# Altium PCB JTag2SWD.PcbDoc
Units mm, origin at the board's own origin, x right, y up, seen from the top; angles counter-clockwise.
Board outline 152.4 x 101.6 mm, 2 copper layers (Top Layer, Bottom Layer); 2 components, 6 nets, 26 pads, 0 vias.
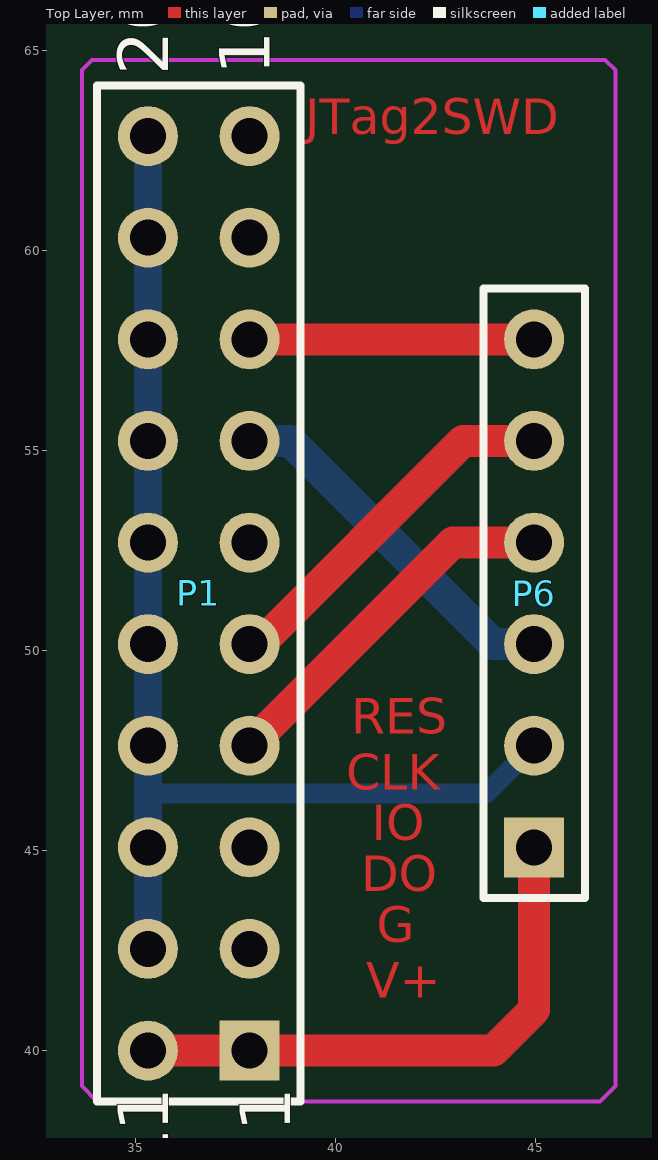
[diagram p0: Top Layer view]
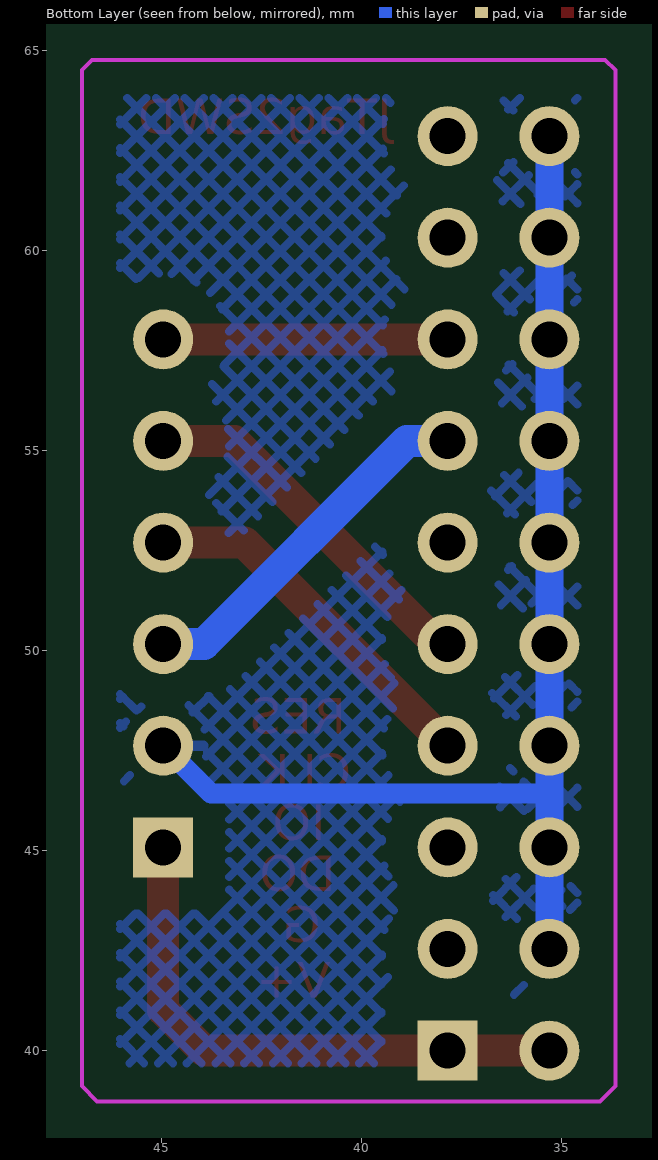
[diagram p1: Bottom Layer view, seen from below]

## Layer stack, top to bottom
Top Solder: solder mask 0.0102, Solder Resist, Dk 3.5
Top Layer: signal copper 0.0356
Dielectric 1: dielectric 0.32, FR-4, Dk 4.8
Bottom Layer: signal copper 0.0356
Bottom Solder: solder mask 0.0102, Solder Resist, Dk 3.5

## Board outline
25.4,25.4 177.8,25.4 177.8,127 25.4,127

## Design rules (kind name [scope] priority, off if disabled: settings)
Clearance Clearance_2 [InPolygon] p1: gap=0.8
Clearance Clearance_1 [(OnLayer('Keep-Out Layer'))] p2: gap=0
Clearance [All] p3: gap=0.2
ComponentClearance [All] p1 off: gap=0.254 collisioncheckmode=3 verticalgap=0.254 showdistances=FALSE
HoleSize [All] p1: absolutevalues=TRUE maxlimit=5 minlimit=0.025 maxpercent=80.000 minpercent=20.000
MinimumSolderMaskSliver [All] p1 off: minsoldermaskwidth=0.254
PolygonConnect [All] p1: connectstyle=Relief reliefconductorwidth=0.254 reliefentries=4 polygonreliefangle="90 Angle" airgapwidth=0.254
RoutingVias [All] p1: holewidth=0.6 width=0.9 viastyle="Through Hole" minholewidth=0.5 minwidth=0.7 maxholewidth=1.5 maxwidth=1.8
SilkToBoardRegionClearance [All] p1 off:
SilkToSilkClearance [All] p1 off: silktosilkclearance=0.254
SilkToSolderMaskClearance [IsPad] p1 off: minsilkscreentomaskgap=0.254 clearancetoexposedcopper=TRUE
SolderMaskExpansion [All] p1: expansion=0.102
Width [All] p1: maxlimit=5 minlimit=0.1 preferedwidth=0.3
24 further rules are at their usual default settings.

## Components (designator, comment, footprint, x,y, rotation, side; value= is the part's Value field where it differs from the comment)
P1 "Header 10X2A" HDR2X10_CEN 37.846,40.005 r90 top
P6 "ProgrammerSocket" HDR1X6 44.958,45.085 r90 top

## Footprints (in the part's own frame and the unit in brackets; to place one, negate y for a bottom-side part, rotate by r counter-clockwise, add the part's x,y. Pads: shape width x height; smd on the part's side, far side on the other; paste and mask are expansions set on the pad)
HDR1X6 [mm] "Connector; Header; 6 Position"
  rect 1.5x1.5 hole 0.9: 1(0,0)
  round 1.5 hole 0.9: 2(2.54,0) 3(5.08,0) 4(7.62,0) 5(10.16,0) 6(12.7,0)
  silkscreen extent -1.27,-1.27 13.97,1.27
HDR2X10_CEN [mm] "Connector; Header; 10x2 Position"
  rect 1.5x1.5 hole 0.9: 1(0,0)
  round 1.5 hole 0.9: 2(2.54,0) 3(5.08,0) 4(7.62,0) 5(10.16,0) 6(12.7,0) 7(15.24,0) 8(17.78,0) 9(20.32,0) 10(22.86,0) 11(0,2.54) 12(2.54,2.54) 13(5.08,2.54) 14(7.62,2.54) 15(10.16,2.54) 16(12.7,2.54) 17(15.24,2.54) 18(17.78,2.54) 19(20.32,2.54) 20(22.86,2.54)
  silkscreen extent -1.27,-1.27 24.13,3.81

## Part data
P1: "Header, 10-Pin, Dual row"
P6: library part "Header 6", "Header, 6-Pin"

## Nets (pads, with @x,y where several pads share a name; then routed paths per layer and width w, separated by ;. In a path a pad name is that pad's centre, name@x,y a point inside that pad or via, vN(x,y) a via of type N, cw(c..) or ccw(c..) an arc to the next point about the centre after c; other vN are vias at no path point)
GND: P1.12 P1.13 P1.14 P1.15 P1.16 P1.17 P1.18 P1.19 P1.20 P6.2 | length 30.4
  Bottom Layer w0.5: 35.363,46.425 43.758,46.425 P6.2
  Bottom Layer w0.7: P1.12 P1.13 P1.14 P1.15 P1.16 P1.17 P1.18 P1.19 P1.20
RESET: P1.8 P6.6 | length 7.1
  Top Layer w0.8: P1.8 P6.6
SWDCLK: P1.5 P6.5 | length 9.2
  Top Layer w0.8: P1.5 38.1,50.165 43.18,55.245 P6.5
SWDIO: P1.4 P6.4 | length 9.2
  Top Layer w0.8: P1.4 42.926,52.705 P6.4
SWDO: P1.7 P6.3 | length 9.2
  Bottom Layer w0.8: P1.7 38.862,55.245 43.942,50.165 P6.3
VCC: P1.1 P1.11 P6.1 | length 14.1
  Top Layer w0.8: P1.11 P1.1 43.942,40.005 44.958,41.021 P6.1
pads on no net: P1.2 P1.3 P1.6 P1.9 P1.10

## Polygon pours and split planes (outlines as drawn)
GND on Bottom Layer "Top Layer-No Net" (hatched 45Degree grid 0.508 track 0.203, pour order 0): 33.909,64.77 34.036,64.643 46.863,64.643 46.863,38.989 46.736,38.862 33.655,38.862

## Keep-outs
Keep-Out Layer:
  lines w0.1: 39.116,38.735 34.036,38.735 ; 34.036,38.735 33.655,39.116 33.655,64.516 33.909,64.77 46.736,64.77 46.99,64.516 46.99,39.116 46.609,38.735 34.036,38.735

## Other copper
Top Layer:
  text "JTag2SWD" at 39.243,62.611 h1.52
  text "RES" at 40.386,47.625 h1.52
  text "CLK" at 40.259,46.228 h1.52
  text "IO" at 40.894,44.958 h1.52
  text "DO" at 40.64,43.688 h1.52
  text "G" at 41.021,42.418 h1.52
  text "V+" at 40.767,41.021 h1.52

## Text inside footprints (layer, text, board x,y; h text height)
P1: Top Overlay "20" at 35.814,64.389 h1.27 r90; Top Overlay "10" at 38.354,64.389 h1.27 r90; Top Overlay "1" at 35.814,37.973 h1.27 r90; Top Overlay "1" at 35.814,36.957 h1.27 r90; Top Overlay "1" at 38.862,37.973 h1.27 r90